# EAGLE board MPGUINO13 (EAGLE 5.03)
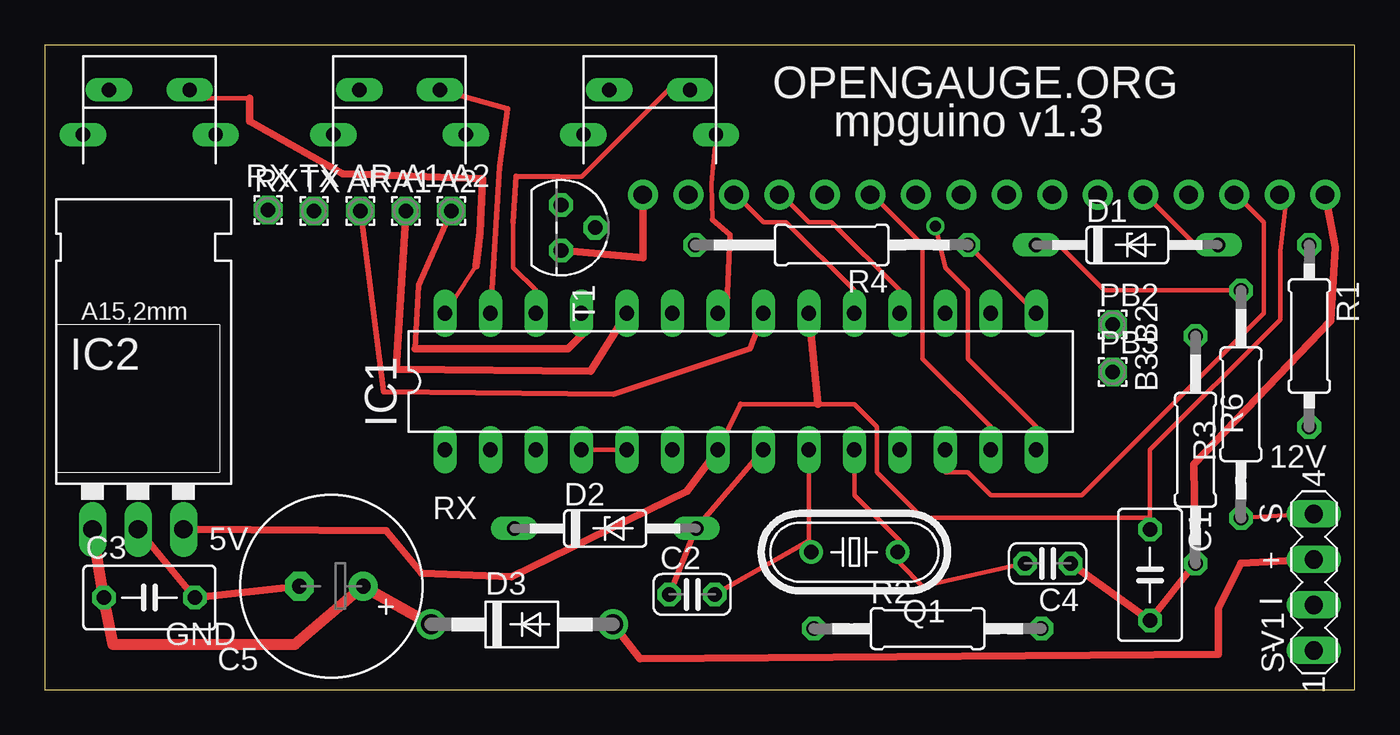
[diagram p0: board, top side]
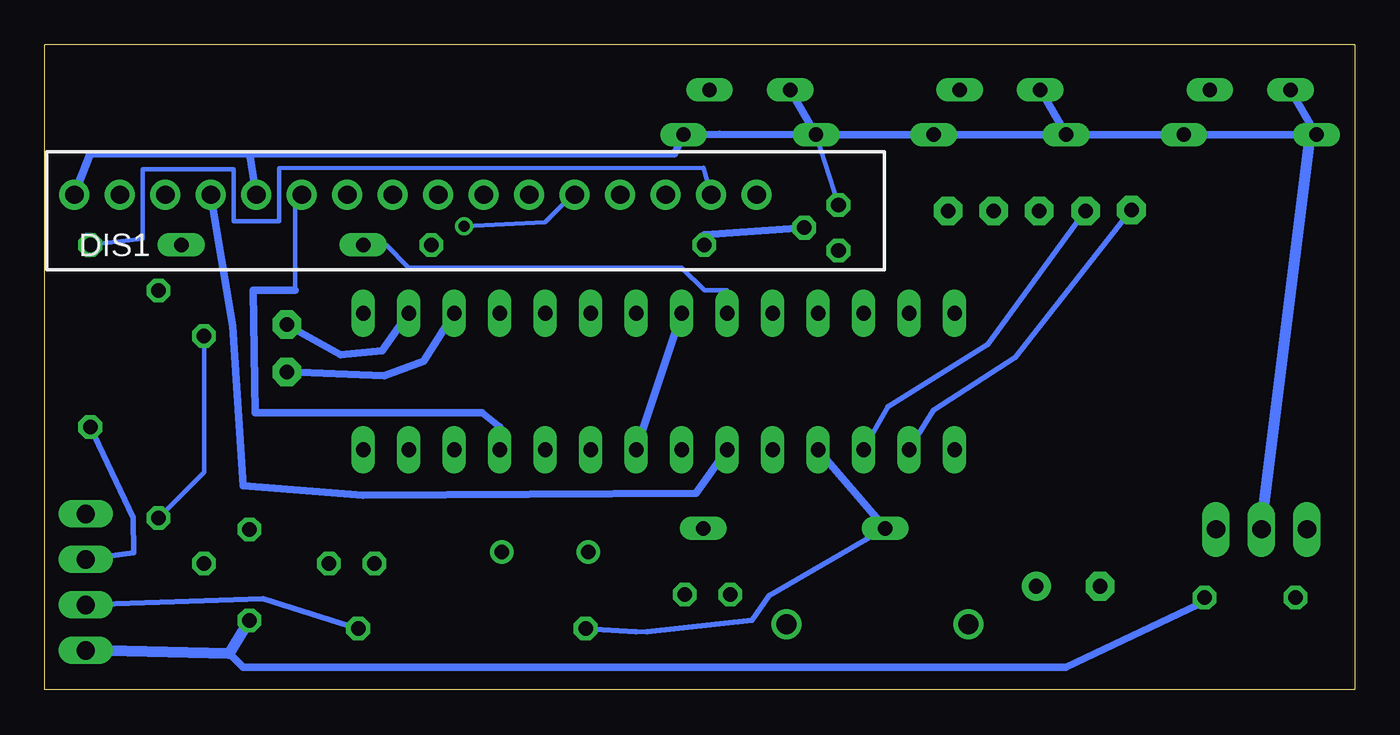
[diagram p1: board, bottom side, seen from below]

Size 73.15 x 36.02 mm. Coordinates in mm from the lower left corner, seen from the top.
Outline: 0,0 73.15,0 73.15,36.02 0,36.02 0,0
Copper layers (1*16): Top 0.035mm / dielectric 1.5mm / Bottom 0.035mm
Design rules "goldphoenix": minimum track width 10mil, minimum drill 24mil, track to track 8mil, track to pad 8mil, pad to pad 8mil, via to via 8mil, smd to smd 8mil, copper to edge 40mil, drill to drill 10mil, minimum pad ring 10mil, minimum via ring 8mil, stop-mask expansion 0mil, vias tented up to drill 0mil, thermal gap 10mil

## Footprints (pad centres in the part's own frame; a part is rotated, then mirrored left to right if it is on the bottom)
1,6/0,8 = drill 0.813 pad 1.6 octagon: 1 0,0
C050-035X075 = drill 0.813 octagon: 1 -2.54,0; 2 2.54,0
C025-024X044 = drill 0.813 octagon: 1 -1.27,0; 2 1.27,0
E3,5-10 = drill 0.813 pad 1.6 round: + -1.778,0 | drill 0.813 pad 1.6 octagon: - 1.778,0
DO35Z10 = drill 0.813 long: A 5.08,0; C -5.08,0
DO41-10 = drill 1.118 round: A 5.08,0; C -5.08,0
TUXGR_16X2_R2 = drill 1.016 pad 1.676 round: 1 -32,15.5; 2 -29.46,15.5; 3 -26.92,15.5; 4 -24.38,15.5; 5 -21.84,15.5; 6 -19.3,15.5; 7 -16.76,15.5; 8 -14.22,15.5; 9 -11.68,15.5; 10 -9.14,15.5; 11 -6.6,15.5; 12 -4.06,15.5; 13 -1.52,15.5; 14 1.02,15.5; 15 3.56,15.5; 16 6.1,15.5
DIL28-3 = drill 0.813 long: 1 -16.51,-3.81; 2 -13.97,-3.81; 3 -11.43,-3.81; 4 -8.89,-3.81; 5 -6.35,-3.81; 6 -3.81,-3.81; 7 -1.27,-3.81; 8 1.27,-3.81; 9 3.81,-3.81; 10 6.35,-3.81; 11 8.89,-3.81; 12 11.43,-3.81; 13 13.97,-3.81; 14 16.51,-3.81; 15 16.51,3.81; 16 13.97,3.81; 17 11.43,3.81; 18 8.89,3.81; 19 6.35,3.81; 20 3.81,3.81; 21 1.27,3.81; 22 -1.27,3.81; 23 -3.81,3.81; 24 -6.35,3.81; 25 -8.89,3.81; 26 -11.43,3.81; 27 -13.97,3.81; 28 -16.51,3.81
78XXL = drill 1.016 long: GND 0,-3.81; IN -2.54,-3.81; OUT 2.54,-3.81
HC49/S = drill 0.813 round: 1 -2.413,0; 2 2.413,0
0207/10 = drill 0.813 octagon: 1 -5.08,0; 2 5.08,0
0207/12 = drill 0.813 octagon: 1 -6.35,0; 2 6.35,0
0207/15 = drill 0.813 octagon: 1 -7.62,0; 2 7.62,0
MA04-1 = drill 1.016 long: 1 -3.81,0; 2 -1.27,0; 3 1.27,0; 4 3.81,0
TO92 = drill 0.813 octagon: 1 1.27,0; 2 0,1.905; 3 -1.27,0
JOGBUTTON = drill 0.8 long: 1 -2.25,-1.5; 2 2.25,-1.5; 3 -3.7,-4; 4 3.7,-4

## Placement (x,y rotation side)
A1  [1,6/0,8]  20.17,26.75 0 top
A2  [1,6/0,8]  22.71,26.75 0 top
AR  [1,6/0,8]  17.63,26.75 0 top
C1  .1uf  [C050-035X075]  61.72,6.43 270 top
C2  22pf  [C025-024X044]  36.14,5.33 0 top
C3  .1uf  [C050-035X075]  5.84,5.16 0 top
C4  22pf  [C025-024X044]  56.01,7.06 180 top
C5  330uf  [E3,5-10]  16,5.79 180 top
D1  ZTK  [DO35Z10]  60.45,24.84 0 top
D2  ZTK  [DO35Z10]  31.29,9.02 0 top
D3  1N4004  [DO41-10]  26.64,3.66 0 top
DIS1  TUXGR_16X2_R2  [TUXGR_16X2_R2]  39.5,12.14 0 bottom
IC1  MEGA8-P  [DIL28-3]  38.86,17.22 0 top
IC2  5VReg  [78XXL]  5.21,12.78 0 top
PB2  [1,6/0,8]  59.64,20.4 0 top
PB3  [1,6/0,8]  59.64,17.75 0 top
Q1  16M  [HC49/S]  45.21,7.7 180 top
R1  80  [0207/10]  70.61,19.76 270 top
R2  50K  [0207/12]  49.3,3.43 0 top
R3  50K  [0207/12]  66.8,15.95 90 top
R4  220  [0207/15]  43.94,24.84 180 top
R6  50K  [0207/12]  64.26,13.41 270 top
RX  [1,6/0,8]  12.47,26.8 0 top
SV1  [MA04-1]  70.87,6.02 90 top
T1  2N3904  [TO92]  28.83,25.81 270 top
TX  [1,6/0,8]  15.04,26.75 0 top
U$1  JOGBUTTON  [JOGBUTTON]  33.78,35 0 top
U$2  JOGBUTTON  [JOGBUTTON]  19.81,35 0 top
U$3  JOGBUTTON  [JOGBUTTON]  5.84,35 0 top

## Library data of the parts
A1 A2 AR PB2 PB3 RX TX = wirepad
C1-C5 R1-R4 R6 = rcl
D1-D3 = diode
DIS1 = display-lcd
IC1 = atmel
IC2 = v-reg
Q1 = crystal
SV1 = con-lstb
T1 = transistor
U$1-U$3 = custom

## Nets
+5V: C1.1 DIS1.2 IC1.7 IC1.20 IC2.OUT
GND: C1.2 C2.1 C3.2 C4.1 C5.- D1.A D2.A DIS1.1 DIS1.5 IC1.8 IC1.22 IC2.GND R6.2 SV1.1 T1.3 U$1.1 U$1.3 U$1.4 U$2.1 U$2.3 U$2.4 U$3.1 U$3.3 U$3.4
N$1: DIS1.4 IC1.6
N$2: DIS1.6 IC1.11
N$3: DIS1.3 IC1.12
N$4: DIS1.11 IC1.13
N$5: DIS1.12 IC1.14
N$6: DIS1.13 IC1.18
N$7: DIS1.14 IC1.19
N$8: C3.1 C5.+ D3.C IC2.IN
N$9: R4.2 T1.2
N$10: C2.2 IC1.9 Q1.2
N$11: C4.2 IC1.10 Q1.1
N$12: R3.1 R6.1 SV1.4
N$13: R2.2 SV1.2
N$14: D1.C IC1.23 R3.2
N$15: IC1.27 U$2.2
N$17: IC1.15 R4.1
N$18: DIS1.7
N$19: A1.1 IC1.24
N$20: IC1.28 U$3.2
N$21: D3.A R1.2 SV1.3
N$22: D2.C IC1.4 IC1.5 R2.1
N$23: DIS1.8
N$24: DIS1.9
N$25: DIS1.10
N$26: A2.1 IC1.25
N$27: IC1.26 U$1.2
N$28: IC1.3 TX.1
N$29: AR.1 IC1.21
N$30: DIS1.16 T1.1
N$31: DIS1.15 R1.1
N$32: IC1.16 PB2.1
N$33: IC1.17 PB3.1
N$34: IC1.2 RX.1

## Tracks (layer width: path | path; a pad name or v marks a point on that pad's centre or on a via)
+5V
  Top 0.254: 61.72,9.6 61.72,13.41 68.99,20.68 68.99,24.49 69.34,27.38 DIS1.2 | 61.72,9.6 49.02,9.6 46.48,12.14 46.48,14.68 45.21,15.95 43.18,15.95 38.86,15.95 | 61.72,9.6 C1.1
  Top 0.305: IC1.7 38.86,15.95
  Top 0.406: 43.18,15.95 IC1.20 | IC1.7 35.87,11.1 26.06,6.33 21.03,6.53 19.05,8.89 IC2.OUT
GND
  Top 0.254: D1.A 64.26,24.84 61.72,27.38 DIS1.5 | IC1.22 38.12,21.03 | 37.29,26.26 37.24,28.27 U$1.4
  Top 0.305: IC1.8 D2.A C2.1 | 37.29,26.26 38.25,25.4 38.08,20.85 IC1.22
  Top 0.406: IC2.GND C3.2 C5.- | C4.1 C1.2 R6.2 64.16,12.6 71.81,20.6 72.06,24.71 DIS1.1
  Bottom 0.254: IC2.GND 5.08,10.16 | 2.54,30.48 U$3.3 | U$1.3 T1.3
  Bottom 0.406: DIS1.1 70.61,29.92 61.72,29.92 | 61.72,29.92 DIS1.5 | 61.72,29.92 38,29.92 U$1.4 35.48,31.01 U$1.3 | IC1.22 IC1.8 | U$1.3 U$2.4 U$2.3 | U$2.3 U$3.4 U$3.3 U$3.1 | U$2.3 U$2.1 | U$1.3 U$1.1
  Bottom 0.61: SV1.1 62.87,2.03 C1.2 | 5.08,10.16 2.54,30.48
N$1
  Bottom 0.254: DIS1.4 64.26,27.38
  Bottom 0.406: IC1.6 36.78,10.97 55.37,10.87 62.08,11.4 62.66,20.34 DIS1.4
N$2
  Bottom 0.254: 59.18,22.3 59.18,27.38 DIS1.6 | IC1.11 47.75,14.68
  Bottom 0.406: 47.75,14.68 48.74,15.47 61.39,15.47 61.52,22.33 59.18,22.3
N$3
  Top 0.254: IC1.12 50.29,12.14 51.56,12.14 52.83,10.87 57.91,10.87 68.07,21.03 68.07,26.11 66.8,27.38 DIS1.3
N$4
  Top 0.254: IC1.13 52.83,14.68 49.02,18.49 49.02,24.84 46.48,27.38 DIS1.11
N$5  (via drill 0.61)
  Top 0.254: v49.73,25.88 50.29,23.57 51.56,22.3 51.56,18.49 55.37,14.68 IC1.14
  Bottom 0.254: v49.73,25.88 45.21,26.11 43.94,27.38 DIS1.12
N$6
  Top 0.254: IC1.18 47.75,22.3 43.94,26.11 42.67,26.11 41.4,27.38 DIS1.13
N$7
  Top 0.254: IC1.19 45.21,22.3 41.4,26.11 40.13,26.11 38.86,27.38 DIS1.14
N$8
  Top 0.61: IC2.IN C3.1 3.81,2.54 13.97,2.54 C5.+ D3.C
N$9
  Bottom 0.406: T1.2 36.32,25.4 R4.2
N$10
  Top 0.254: IC1.9 42.67,8.33 Q1.2
  Top 0.305: C2.2 42.67,8.33
N$11
  Top 0.254: IC1.10 45.21,10.87 47.75,8.33 Q1.1 47.75,7.06 49.02,5.79 C4.2
N$12
  Top 0.254: R3.1 SV1.4
  Bottom 0.254: R6.1 64.26,17.22 64.26,12.14 R3.1
N$13
  Bottom 0.305: SV1.2 60.96,5.08 R2.2
N$14
  Top 0.254: R3.2 59.18,22.3 56.64,24.84 D1.C
  Bottom 0.254: IC1.23 35.05,22.3 36.32,22.3 37.59,23.57 52.83,23.57 54.1,24.84 D1.C
N$15
  Top 0.305: IC1.27 25.4,29.21 25.86,32.44 U$2.2
N$16
  Bottom 0.406: 8.23,5 16.13,1.27 62.08,1.27 62.89,2.08
N$17
  Top 0.254: R4.1 IC1.15
N$19
  Top 0.406: IC1.24 30.48,17.78 19.61,17.91 A1.1
N$20
  Top 0.254: 11.43,33.02 8.89,33.02 U$3.2 | 24.08,23.67 IC1.28
  Top 0.406: 24.08,23.67 24.31,25.55 24.43,28.55 16.64,28.83 11.43,31.75 11.43,33.02
N$21
  Top 0.406: SV1.3 66.8,7.06 65.53,4.52 65.53,1.98 33.25,1.75 D3.A
  Bottom 0.305: R1.2 68.22,9.6 68.17,7.67 SV1.3
N$22
  Top 0.254: IC1.4 IC1.5
  Bottom 0.254: 39.52,3.25 40.13,3.25
  Bottom 0.305: 39.52,3.25 33.66,3.89 32.72,5.26 D2.C | 40.13,3.25 R2.1
  Bottom 0.406: D2.C IC1.4
N$26
  Top 0.305: 20.68,19.05 20.88,22.61 A2.1
  Top 0.406: IC1.25 29.97,19.81 29.21,19.05 20.68,19.05
N$27
  Top 0.254: 28.7,28.65 29.97,28.65 35.05,33.73 U$1.2 | 26.16,26.11 26.16,23.57 27.43,22.3 IC1.26
  Top 0.305: 26.16,26.11 26.31,28.68 28.7,28.65
N$28
  Bottom 0.305: IC1.3 26.06,15.8 20.5,19.3 TX.1
N$29
  Top 0.305: AR.1 18.92,16.64 31.75,16.51 39.37,19.05 IC1.21
N$30
  Top 0.406: T1.1 33.4,24.13 DIS1.16
N$31
  Bottom 0.254: DIS1.15 36.37,29.16 60.07,29.13 60.07,26.16 62.61,26.16 62.61,29.06 67.69,29.06 67.69,25.2 R1.1
N$32
  Bottom 0.406: IC1.16 54.3,18.95 56.64,18.72 PB2.1
N$33
  Bottom 0.406: IC1.17 51.99,18.36 54.2,17.55 PB3.1
N$34
  Bottom 0.305: IC1.2 23.52,15.62 18.95,18.57 RX.1

## Text on the board
tPlace: OPENGAUGE.ORG | mpguino v1.3 | RX TX AR A1 A2 | B3 B2 | 12V | RX | 5V | GND | - I + S